# Altium PCB STK200_BLUETOOTH.PCBDOC
Units mm, origin at the board's own origin, x right, y up, seen from the top; angles counter-clockwise.
Board outline 152.4 x 101.6 mm, 2 copper layers (Top Layer, Bottom Layer); 40 components, 40 nets, 164 pads, 13 vias.
Unrouted connection lines stored in the file: 2.
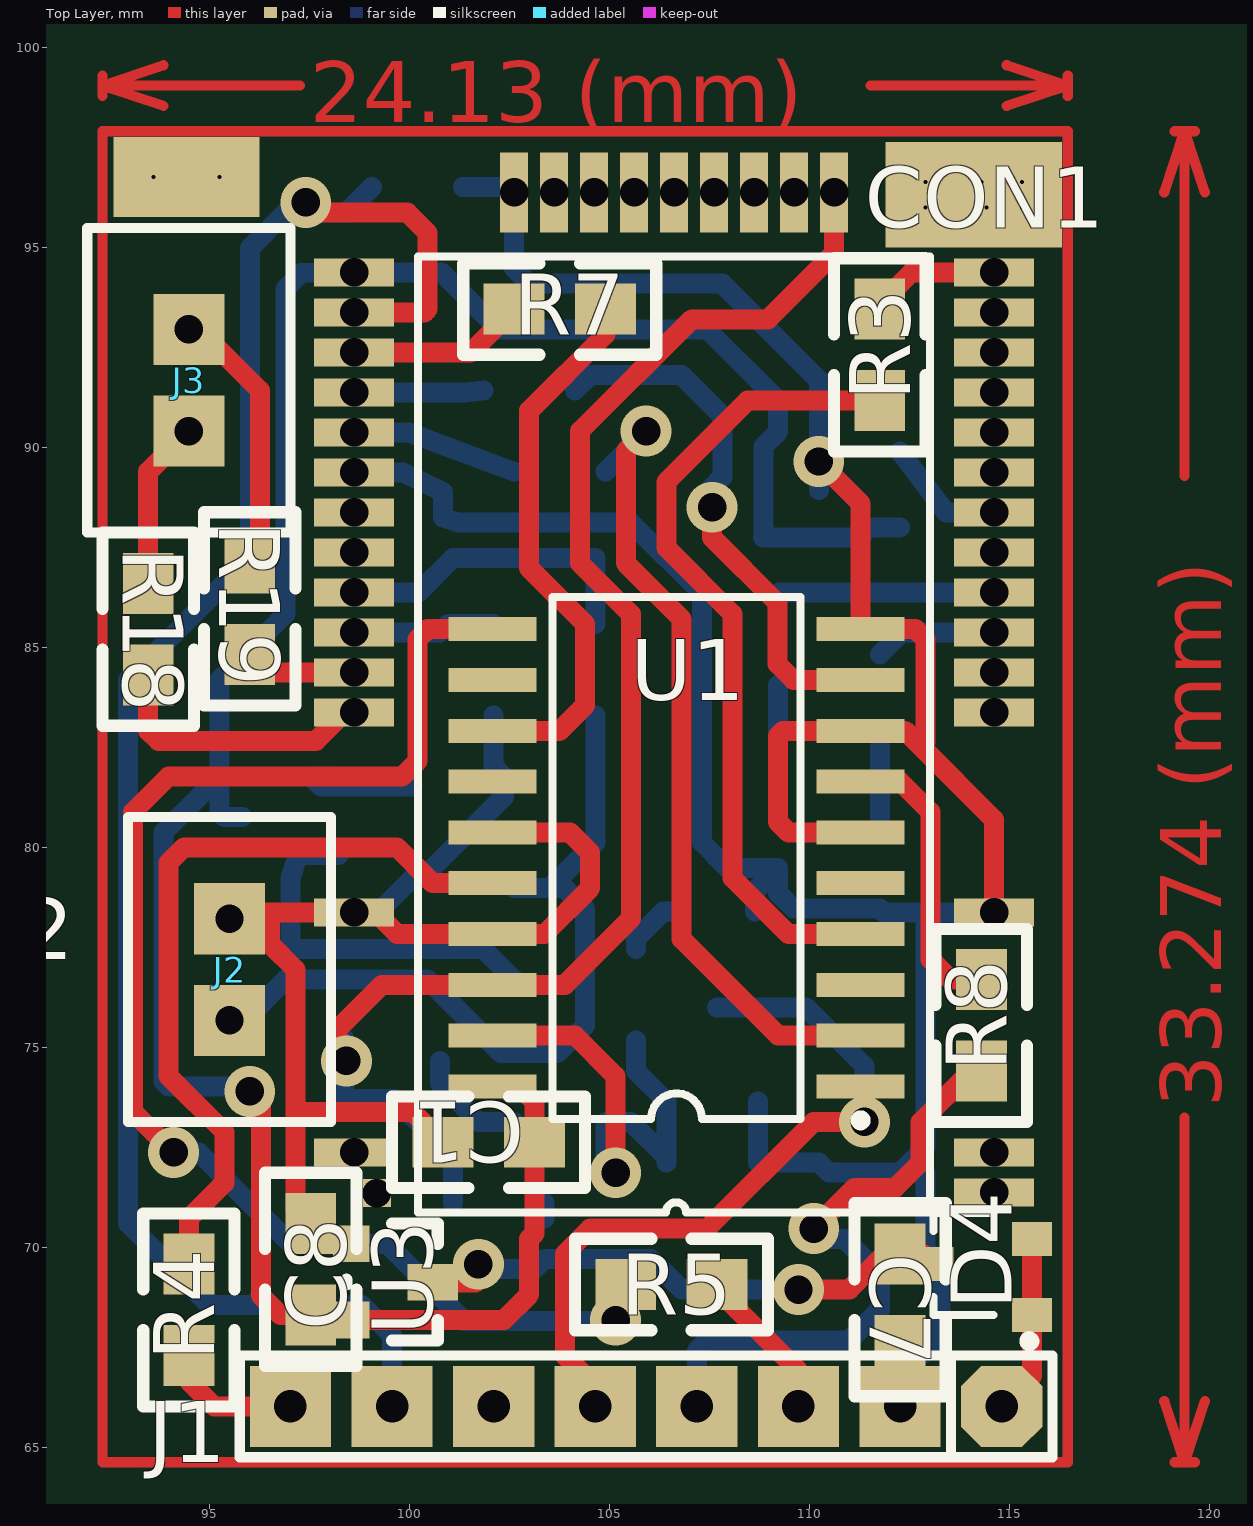
[diagram p0: Top Layer view]
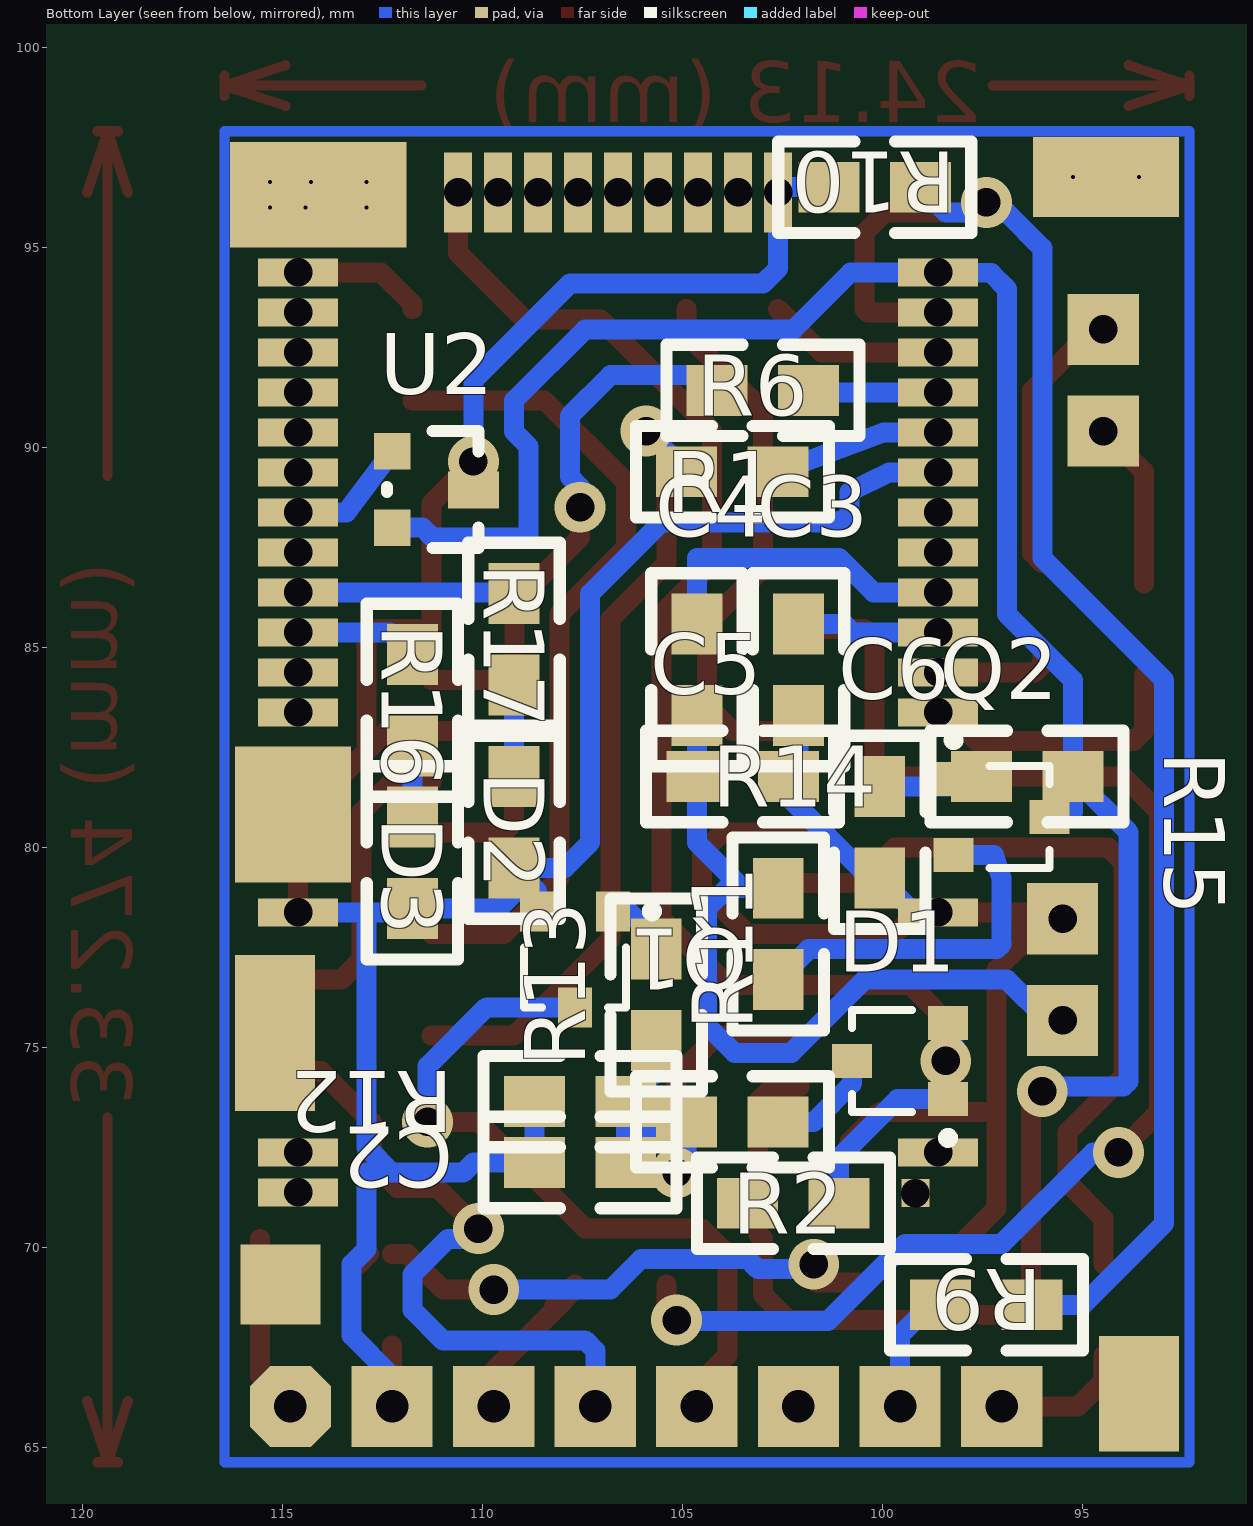
[diagram p1: Bottom Layer view, seen from below]

## Layer stack, top to bottom
Top Layer: signal copper 0.0356
Dielectric: dielectric 0.32, FR-4, Dk 4.8
Bottom Layer: signal copper 0.0356

## Board outline
25.4,25.4 177.8,25.4 177.8,127 25.4,127

## Design rules (kind name [scope] priority, off if disabled: settings)
Clearance [All] p1: gap=0.01
ComponentClearance [All] p1 off: gap=0.01 collisioncheckmode=0
PolygonConnect [All] p1: connectstyle=Relief reliefconductorwidth=0.254 reliefentries=4 polygonreliefangle="90 Angle"
RoutingLayers [All] p1: top layer=Horizontal bottom layer=Vertical
RoutingVias [All] p1: holewidth=0.711 width=1.27 viastyle="Through Hole" minholewidth=0.711 minwidth=1.27 maxholewidth=0.711 maxwidth=1.27
SolderMaskExpansion [All] p1: expansion=0.102
TestPointUsage [All] p1: valid=0 allowmultiple=FALSE
Testpoint [All] p1: side=15 testpointundercomponent=TRUE minsize=1.016 maxsize=2.54 preferedsize=1.524 minholesize=0 maxholesize=1.016 preferedholesize=0.813 testpointgrid=0.025 style=1023 order=-539222988
Width [All] p1: maxlimit=0.5 minlimit=0.5 preferedwidth=0.5
16 further rules are at their usual default settings.

## Components (designator, comment, footprint, x,y, rotation, side; value= is the part's Value field where it differs from the comment)
C1 "Cap" 0805 103.124,72.644 r180 top
C2 "Cap" 0805 108.712,72.136 r180 bottom
C3 "Cap" 0805 102.108,83.312 r90 bottom
C4 "Cap" 0805 104.648,83.312 r90 bottom
C5 "Cap" 0805 104.648,81.788 r180 bottom
C6 "Cap" 0805 100.076,79.248 r90 bottom
C7 "Cap" 0805 112.268,67.564 r90 top
C8 "Cap" 0805 97.536,70.612 r270 top
CON1 "F2M03AC2" F2M03AC2_conn 110.617,72.39 r180 top
D1 "BAT54C" SOT23#1 99.568,74.676 r90 bottom
D2 "TLED" 0805 109.22,81.788 r270 bottom
D3 "TLED" 0805 111.76,80.772 r270 bottom
D4 "BAT54C" SOT23#2 114.3,69.596 r90 top
J1 "TCON8" TSIP8 114.808,66.04 r180 top
J2 "MICRO" CON2 95.504,80.772 r90 top
J3 "SPKR" CON2 94.488,87.884 r270 top
Q1 "BSS123" SOT23#1 107.696,77.216 r0 bottom
Q2 "BSS123" SOT23#1 97.028,80.772 r270 bottom
R1 "Res2" 0805 102.616,89.408 r0 bottom
R2 "Res2" 0805 101.092,71.12 r0 bottom
R3 "Res2" 0805 111.76,93.472 r270 top
R4 "Res2" 0805 94.488,69.596 r270 top
R5 "Res2" 0805 107.696,69.088 r180 top
R6 "Res2" 0805 104.14,91.44 r180 bottom
R7 "Res2" 0805 102.616,93.472 r0 top
R8 "Res2" 0805 114.3,76.708 r270 top
R9 "Res2" 0805 98.552,68.58 r180 bottom
R10 "Res2" 0805 99.06,96.52 r0 bottom
R11 "Res2" 0805 102.616,73.152 r0 bottom
R12 "Res2" 0805 108.712,73.66 r180 bottom
R13 "Res2" 0805 105.664,75.184 r90 bottom
R14 "Res2" 0805 102.616,76.708 r90 bottom
R15 "Res2" 0805 97.536,81.788 r180 bottom
R16 "Res2" 0805 111.76,84.836 r270 bottom
R17 "Res2" 0805 109.22,86.36 r270 bottom
R18 "Res2" 0805 93.472,84.328 r90 top
R19 "Res2" 0805 96.012,84.836 r90 top
U1 "74ACT244M" SO20 106.68,79.756 r90 top
U2 "DS1818-10" SOT-23 112.268,89.916 r270 bottom
U3 "XC6206" sot-23 98.552,70.104 r270 top

## Footprints (in the part's own frame and the unit in brackets; to place one, negate y for a bottom-side part, rotate by r counter-clockwise, add the part's x,y. Pads: shape width x height; smd on the part's side, far side on the other; paste and mask are expansions set on the pad)
0805 [mil]
  rect 60x50 smd: 1(0,0) 2(90,0)
  silkscreen extent -50,-45 140,45
CON2 [mil]
  rect 70x70 hole 28: 1(-200,0) 2(-100,0)
  silkscreen extent -300,-100 0,100
F2M03AC2_conn [mm]
  rect 2x0.7 hole 0.711: 1(12,-11) 2(12,-12) 3(12,-13) 4(12,-14) 5(12,-15) 6(12,-16) 7(12,-17) 8(12,-18) 9(12,-19) 10(12,-20) 11(12,-21) 12(12,-22) 22(-4,-22) 23(-4,-21) 24(-4,-20) 25(-4,-19) 26(-4,-18) 27(-4,-17) 28(-4,-16) 29(-4,-15) 30(-4,-14) 31(-4,-13) 32(-4,-12) 33(-4,-11) 34(-4,-6) 35(12,-6) 36(-4,0) 37(-4,1) 38(12,0)
  rect 0.7x2 hole 0.711: 13(8,-24) 14(7,-24) 15(6,-24) 16(5,-24) 17(4,-24) 18(3,-24) 19(2,-24) 20(1,-24) 21(0,-24)
  rect 0.7x0.7 hole 0.711: 39(11.43,1.016)
  silkscreen extent -2.4,-22.4 10.4,1.5
SO20 [mm] "Small Outline, Plastic; 20 Leads; Body Width 7.5 mm; Pitch 1.27 mm"
  rect 0.6x2.2 smd: 1(-5.715,-4.6) 2(-4.445,-4.6) 3(-3.175,-4.6) 4(-1.905,-4.6) 5(-0.635,-4.6) 6(0.635,-4.6) 7(1.905,-4.6) 8(3.175,-4.6) 9(4.445,-4.6) 10(5.715,-4.6) 11(5.715,4.6) 12(4.445,4.6) 13(3.175,4.6) 14(1.905,4.6) 15(0.635,4.6) 16(-0.635,4.6) 17(-1.905,4.6) 18(-3.175,4.6) 19(-4.445,4.6) 20(-5.715,4.6)
  silkscreen extent -6.69,-4.73 6.53,3.1
SOT23#1 [mm] "SOT-23; 3 Leads; Body 3.0 x 2.5 mm, inc. leads (LxW max)"
  rect 0.85x1 smd: 1(-0.95,-1.2) 2(0.95,-1.2) 3(0,1.2)
  silkscreen extent -2.05,-1.32 1.27,1.2
SOT23#2 [mm] "SOT-23; 3 Leads; Body 3.0 x 2.5 mm, inc. leads (LxW max)"
  rect 0.85x1 smd: 1(-1.27,-1.27) 2(0.635,-1.27) 3(0,1.2)
  silkscreen extent -2.05,-1.32 1.28,1.2
SOT-23 [mil]
  rect 36x36 smd: 1(0,0) 2(75,0)
  rect 36x50 smd: 3(38,80)
  silkscreen extent -20,-5 95,85
sot-23 [mil]
  rect 36x36 smd: 1(0,0) 2(75,0)
  rect 36x50 smd: 3(38,80)
  silkscreen extent -20,-5 95,85
TSIP8 [mil]
  oct 80x80 hole 32: 1(0,0)
  rect 80x80 hole 32: 2(100,0) 3(200,0) 4(300,0) 5(400,0) 6(500,0) 7(600,0) 8(700,0)
  silkscreen extent -50,-50 750,50

## Part data
C1 C2 C3 C4 C5 C6 C7 C8: "Capacitor"
D1 D4: "Schottky Barrier Double Diode"
J2 J3: library part CON2
Q1 Q2: "N-channel Enhancement Mode Vertical D-MOSFET"
R1 R2 R3 R4 R5 R6 R7 R8 R9 R10 R11 R12 R13 R14 R15 R16 R17 R18 R19: "Resistor"
U1: "Octal Bus Buffer with 3 State Outputs (Non Inverted)"
U2: "3.3V EconoReset with Pushbutton"
U3: library part LM317

## Free pads (board coordinates)
  rect 2x2 smd far side: 0(93.599,65.913) 0(93.599,66.802) 0(114.3,80.137) 0(114.3,81.534) 0(115.062,69.088) 0(115.189,74.422) 0(115.189,76.327) 0(115.189,80.137) 0(115.189,81.534)
  rect 2x2 hole 0.1: 0(93.599,96.774) 0(95.25,96.774) 0(112.903,96.012) 0(112.903,96.647) 0(114.3,96.647) 0(114.427,96.012) 0(115.316,96.012) 0(115.316,96.647)

## Via types
v1: diameter 1.27, hole 0.711, Top Layer to Bottom Layer, 13 vias

## Nets (pads, with @x,y where several pads share a name; then routed paths per layer and width w, separated by ;. In a path a pad name is that pad's centre, name@x,y a point inside that pad or via, vN(x,y) a via of type N, cw(c..) or ccw(c..) an arc to the next point about the centre after c; other vN are vias at no path point)
3V3: C1.1 C8.2 CON1.12 Q2.3 R15.2 U1.20 U2.2 U3.2 | length 80.9
  Top Layer w0.5: v1@95.758,74.093 v1@96.292,73.559 ; v1@95.974,73.876 v1@96.292,73.559 ; U3.2 102.362,68.199 102.995,68.832 102.995,70.229 103.124,70.358 ; v1@96.292,73.559 96.292,68.808 96.774,68.326 ; 96.774,68.326 C8.2 97.434,68.326 96.774,68.326 ; U1.20@102.743,74.041 U1.20 U1.20@102.743,74.041 ; U1.20@102.743,74.041 103.124,73.66 ; 103.124,70.358 103.124,73.66 ; 103.124,70.358 C1.1 103.124,73.66
  Bottom Layer w0.5: 97.282,94.361 96.901,93.98 96.901,85.852 95.25,84.201 ; 93.853,80.391 R15.2 ; 93.853,80.391 R15.2 ; 93.853,80.391 93.853,74.168 93.98,74.041 ; 93.98,74.041 v1@96.012,74.041 ; 93.98,74.041 v1@96.012,74.041 ; 95.25,80.899 95.25,84.201 ; 95.25,80.899 R15.2 ; 95.25,80.899 Q2.3@95.377,80.772 ; R15.2 95.25,84.201 ; Q2.3@95.377,80.772 Q2.3 Q2.3@95.377,80.772 ; v1@96.012,74.041 96.094,73.959 96.075,73.977 v1@96.012,74.041 ; CON1.12 97.282,94.37 CON1.12 ; CON1.12 100.809,94.39 ; CON1.12 100.809,94.39 ; 100.809,94.39 102.235,92.964 107.442,92.964 109.22,91.186 109.22,90.407 108.856,90.043 108.856,87.761 108.839,87.757 111.252,87.757 111.506,88.011 ; 111.506,88.011 U2.2 111.506,88.011
  other v1: 96.012,73.914
5V: D4.1 D4.2 J1.1 | length 9
  Top Layer w0.5: 115.57,66.802 J1.1 115.57,66.802 ; 115.57,66.802 D4.1 ; 115.57,66.802 D4.1 ; D4.1 D4.2 D4.1
/RST: J1.5 Q1.3 U1.1 | length 20
  Top Layer w0.5: J1.5 104.648,66.548 103.886,67.31 103.886,69.85 104.521,70.485 107.442,70.485 110.109,73.152 v1(111.379,73.152) 111.379,73.942 U1.1
  Bottom Layer w0.5: Q1.3 109.912,76.016 111.379,74.549 v1@111.379,72.771
CTS: CON1.11 R9.2 R10.1 | length 43.3
  Top Layer w0.5: CON1.11 100.375,93.39 100.457,93.472 100.457,95.377 99.949,95.885 ; 99.949,95.885 97.409,95.885 99.949,95.885
  Bottom Layer w0.5: R9.2@96.266,68.834 R9.2 94.996,68.58 92.964,70.612 92.964,84.201 96.012,87.249 96.012,94.996 96.901,95.885 98.425,95.885 R10.1
  other v1: 97.409,96.139
DSR: CON1.21 D1.1 D1.2 R2.1 U1.18 | length 49.2
  Top Layer w0.5: 98.171,75.438 v1(98.425,74.676) 98.171,75.438 ; 98.171,75.438 99.314,76.581 ; 99.314,76.581 103.886,76.581 ; 99.314,76.581 U1.18 103.886,76.581 ; 103.886,76.581 105.537,78.232 105.537,85.852 104.267,87.122 104.267,90.424 107.061,93.218 108.966,93.218 110.617,94.869 ; 110.617,94.869 CON1.21 110.617,94.869
  Bottom Layer w0.5: D1.2@98.171,75.429 D1.2@98.368,75.232 ; D1.2@98.171,75.429 v1(98.425,74.676) 98.368,74.845 D1.2@98.171,75.429 ; D1.2@98.171,75.429 D1.2@98.368,75.232 ; D1.1 D1.2@98.368,75.232 ; D1.1 99.629,73.726 ; D1.1 99.629,73.726 ; 99.629,73.726 101.092,72.263 ; 101.092,72.263 R2.1 101.092,72.263
DTR: CON1.22 R3.1 | length 5.5
  Top Layer w0.5: R3.1@111.76,93.599 R3.1 R3.1@111.76,93.599 ; R3.1@111.76,93.599 112.551,94.39 ; 112.551,94.39 CON1.22 112.551,94.39
GND: C1.2 C2.1 C3.1 C5.2 C6.1 C7.1 C8.1 CON1.7 CON1.13 CON1.34 CON1.35 D2.2 D3.2 J1.2 J2.2 Q1.2 R10.2 R12.1 U1.6 U1.8 U1.10 U1.15 U1.17 U2.3 U3.1 | length 186.6
  Top Layer w0.5: J2.2@95.662,78.39 J2.2 J2.2@95.662,78.39 ; J2.2@95.662,78.39 CON1.35@99.156,78.39 ; J2.2@95.662,78.39 96.52,78.39 ; 96.52,77.597 96.52,78.39 ; 96.52,77.597 96.52,78.232 96.52,78.39 ; 96.52,77.597 97.155,76.962 ; 96.52,78.39 CON1.35 CON1.35@99.156,78.39 ; C8.1@97.155,70.993 C8.1@98.044,70.104 ; C8.1@97.155,70.993 97.155,76.962 ; C8.1@97.155,70.993 97.155,73.406 ; C8.1@97.155,70.993 C8.1 C8.1@98.044,70.104 ; 97.155,73.406 100.076,73.406 ; 97.155,73.406 100.076,73.406 ; 97.155,73.406 97.155,76.962 ; C8.1@98.044,70.104 U3.1 C8.1@98.044,70.104 ; CON1.35@99.156,78.39 99.695,77.851 ; 99.695,77.851 103.378,77.851 ; 99.695,77.851 U1.17 103.378,77.851 ; 100.076,73.406 C1.2 100.076,73.406 ; 103.378,77.851 104.521,78.994 104.521,79.883 104.013,80.391 ; 104.013,80.391 U1.15 104.013,80.391 ; 109.347,82.931 112.395,82.931 ; 109.347,82.931 U1.8 112.395,82.931 ; 109.347,82.931 109.22,82.804 109.22,80.645 109.474,80.391 ; 109.474,80.391 U1.6 109.474,80.391 ; U1.10 112.649,85.471 ; U1.10 111.28,88.618 ; U1.10 112.649,85.471 ; U1.10 111.28,88.618 ; 111.28,88.618 v1(110.236,89.662) 111.28,88.618 ; 112.395,82.931 114.617,80.709 ; 112.395,82.931 112.794,82.532 ; 112.649,85.471 112.903,85.217 112.903,82.64 ; 112.794,82.532 112.903,82.64 ; 112.794,82.532 112.903,82.64 ; 112.794,82.532 114.617,80.709 ; 114.617,80.709 CON1.34 114.617,80.709 ; J1.2 C7.1 J1.2
  Bottom Layer w0.5: J1.2@112.268,66.802 113.284,67.818 113.284,69.596 112.903,69.977 112.903,71.882 ; CON1.35@99.218,78.39 CON1.35 CON1.35@99.218,78.39 ; CON1.35@99.218,78.39 C6.1 ; CON1.35@99.218,78.39 C6.1 ; 99.84,89.39 CON1.7 99.84,89.39 ; 99.84,89.39 100.838,88.9 100.838,88.265 101.219,88.138 105.537,88.138 107.315,86.36 107.315,80.137 107.95,79.502 D2.2 ; C6.1 C6.1@100.33,79.248 ; C6.1 C6.1@100.33,79.248 ; C6.1@100.33,79.248 102.362,81.28 C5.2 ; C5.2@102.108,82.042 C3.1 C5.2@102.108,82.042 ; C5.2@102.108,82.042 C5.2 ; C5.2@102.108,82.042 C5.2 ; CON1.13@102.487,96.52 R10.2 CON1.13@102.487,96.52 ; CON1.13@102.487,96.52 CON1.13 ; CON1.13@102.487,96.52 CON1.13 ; 102.617,94.489 CON1.13 ; 102.617,94.489 CON1.13 ; 102.617,94.489 102.999,94.107 107.823,94.107 110.236,91.694 ; D2.2@108.646,78.928 Q1.2 D2.2@108.646,78.928 ; D2.2@108.646,78.928 D2.2 ; D2.2@108.646,78.928 D2.2 ; C2.1 110.236,72.136 ; C2.1 R12.1 C2.1 ; C2.1 110.236,72.136 ; D2.2@109.22,78.867 D2.2 ; D2.2@109.22,78.867 D2.2 ; D2.2@109.22,78.867 109.601,78.486 ; 109.601,78.486 D3.2 ; 109.601,78.486 D3.2 ; 110.236,72.136 110.49,71.882 ; 110.236,91.694 U2.3 v1(110.236,89.662) 110.236,91.694 ; 110.49,71.882 112.903,71.882 ; 110.49,71.882 112.268,71.882 ; D3.2 D3.2@111.856,78.39 ; D3.2 D3.2@111.856,78.39 ; D3.2@111.856,78.39 CON1.34 112.903,78.39 ; D3.2@111.856,78.39 112.903,78.39 ; 112.268,71.882 112.903,72.517 ; 112.268,71.882 112.903,72.517 ; 112.268,71.882 112.903,71.882 ; 112.903,72.517 112.903,78.39 ; 112.903,72.517 112.903,78.39
MIC+: C4.2 CON1.4 | length 11.3
  Bottom Layer w0.5: 100.233,86.39 CON1.4 100.233,86.39 ; 100.233,86.39 101.092,87.249 104.648,87.249 ; 104.648,87.249 C4.2 104.648,87.249
MIC-: C3.2 CON1.3 | length 6.9
  Bottom Layer w0.5: 100.757,85.39 CON1.3 100.757,85.39 ; 100.757,85.39 100.965,85.598 ; 100.965,85.598 C3.2 100.965,85.598
MISO: J1.7 R9.1 | length 5.1
  Bottom Layer w0.5: R9.1@98.806,68.58 R9.1 R9.1@98.806,68.58 ; R9.1@98.806,68.58 99.568,67.818 ; 99.568,67.818 J1.7 99.568,67.818
MOSI: J1.8 R4.2 | length 6
  Top Layer w0.5: R4.2@94.488,66.675 R4.2 R4.2@94.488,66.675 ; R4.2@94.488,66.675 95.123,66.04 ; 95.123,66.04 J1.8 95.123,66.04
NetC4_1: C4.1 C5.1 J2.1 R14.2 | length 26.8
  Bottom Layer w0.5: J2.1 95.504,75.565 J2.1 ; J2.1 J2.1@95.885,75.692 ; J2.1 J2.1@95.885,75.692 ; J2.1@95.885,75.692 96.901,76.708 100.457,76.708 102.287,74.878 103.707,74.878 104.394,75.565 104.394,78.486 103.886,78.994 ; 103.505,78.994 104.648,80.137 ; 103.505,78.994 104.648,80.137 ; 103.505,78.994 103.886,78.994 ; 103.505,78.994 R14.2 103.886,78.994 ; 104.648,80.137 C4.1 C5.1 104.648,80.137
NetC6_2: C6.2 Q2.1 R15.1 | length 6.7
  Bottom Layer w0.5: R15.1 Q2.1@97.79,81.534 ; R15.1 Q2.1@98.162,81.788 ; R15.1 Q2.1@98.162,81.788 ; R15.1 Q2.1@97.79,81.534 ; Q2.1@97.79,81.534 C6.2 98.228,81.534 Q2.1@97.79,81.534 ; Q2.1@98.162,81.788 Q2.1 Q2.1@98.162,81.788
NetC7_2: C7.2 D4.3 U3.3 | length 15.2
  Top Layer w0.5: v1(109.728,68.961) 110.998,68.961 111.887,69.85 C7.2 ; v1@101.651,69.139 U3.3 101.27,69.139 v1@101.651,69.139 ; v1@101.651,69.139 101.981,69.469 101.917,69.406 v1@101.651,69.139 ; D4.3@112.846,69.85 D4.3 D4.3@112.846,69.85
  Bottom Layer w0.5: v1(101.727,69.596) 101.854,69.469 103.124,69.469 103.378,69.723 106.045,69.723 106.807,68.961 v1(109.728,68.961)
NetCON1_28: CON1.28 U2.1 | length 6.2
  Bottom Layer w0.5: 113.413,88.39 U2.1 113.413,88.39 ; 113.413,88.39 CON1.28 113.413,88.39
NetCON1_30: CON1.30 R17.1 | length 10.7
  Bottom Layer w0.5: R17.1@109.25,86.39 CON1.30 R17.1@109.25,86.39
NetCON1_31: CON1.31 R16.1 | length 6.2
  Bottom Layer w0.5: R16.1@112.314,85.39 R16.1 R16.1@112.314,85.39 ; R16.1@112.314,85.39 CON1.31 R16.1@112.314,85.39
NetD1_3: D1.3 R11.1 | length 4.3
  Bottom Layer w0.5: 100.768,74.111 D1.3 100.768,74.111 ; 100.768,74.111 101.727,73.152 ; 101.727,73.152 R11.1 101.727,73.152
NetD2_1: D2.1 R17.2 | length 4.6
  Bottom Layer w0.5: D2.1 R17.2 D2.1
NetD3_1: D3.1 R16.2 | length 3.6
  Bottom Layer w0.5: D3.1 R16.2 D3.1
NetJ3_1: J3.1 R19.2 | length 7.4
  Top Layer w0.5: J3.1@94.742,92.964 J3.1 J3.1@94.742,92.964 ; J3.1@94.742,92.964 96.266,91.44 R19.2@96.266,87.376 ; R19.2@96.266,87.376 R19.2 R19.2@96.266,87.376
NetJ3_2: J3.2 R18.2 | length 8.5
  Top Layer w0.5: 93.472,89.408 R18.2 93.472,89.408 ; 93.472,89.408 J3.2 93.472,89.408
NetQ1_1: Q1.1 R13.2 | length 2.3
  Bottom Layer w0.5: R13.2@105.664,77.724 R13.2 R13.2@105.664,77.724 ; R13.2@105.664,77.724 Q1.1@106.356,78.416 ; Q1.1@106.356,78.416 Q1.1 Q1.1@106.356,78.416
NetQ2_2: Q2.2 R14.1 | length 11.3
  Bottom Layer w0.5: 97.221,79.822 Q2.2 97.221,79.822 ; 97.221,79.822 97.028,79.248 97.028,77.597 97.155,77.47 101.854,77.47 ; 101.854,77.47 R14.1 101.854,77.47
NetR1_2: R1.2 U1.2 | length 24.6
  Top Layer w0.5: 105.41,89.916 v1(105.918,90.424) 105.41,89.916 ; 105.41,89.916 105.41,87.122 106.807,85.725 106.807,77.724 109.22,75.311 ; 109.22,75.311 U1.2 109.22,75.311
  Bottom Layer w0.5: R1.2 v1(105.918,90.424) R1.2
NetR3_2: R3.2 U1.4 | length 20.5
  Top Layer w0.5: U1.4 109.474,77.851 108.077,79.248 108.077,85.852 106.426,87.503 106.426,89.154 108.458,91.186 R3.2
NetR4_1: R4.1 U1.16 | length 22.2
  Top Layer w0.5: 94.488,70.739 R4.1 94.488,70.739 ; 94.488,70.739 95.377,71.628 95.377,72.898 93.98,74.295 93.98,79.629 94.361,80.01 99.695,80.01 100.584,79.121 ; 100.584,79.121 U1.16 100.584,79.121
NetR5_2: R5.2 U1.11 | length 40.1
  Top Layer w0.5: 93.091,73.406 v1(94.107,72.39) 93.091,73.406 ; 93.091,73.406 93.091,80.899 93.98,81.788 99.822,81.788 100.203,82.169 100.203,85.217 100.457,85.471 ; 100.457,85.471 U1.11 100.457,85.471 ; R5.2@105.41,68.453 v1(105.156,68.199) R5.2@105.41,68.453 ; R5.2@105.41,68.453 R5.2 R5.2@105.41,68.453
  Bottom Layer w0.5: 94.742,72.39 v1(94.107,72.39) 94.742,72.39 ; 94.742,72.39 97.028,70.104 99.441,70.104 101.367,68.178 v1@105.135,68.178 ; v1@105.135,68.178 v1(105.156,68.199) v1@105.135,68.178
NetR6_1: R6.1 U1.9 | length 17
  Top Layer w0.5: 107.569,87.757 v1(107.569,88.519) 107.569,87.757 ; 107.569,87.757 109.201,86.125 109.201,84.601 109.601,84.201 ; 109.601,84.201 U1.9 109.601,84.201
  Bottom Layer w0.5: R6.1@104.521,91.821 R6.1 R6.1@104.521,91.821 ; R6.1@104.521,91.821 106.807,91.821 107.823,90.805 107.823,89.281 v1@107.569,89.027 ; v1@107.569,89.027 v1(107.569,88.519) v1@107.569,89.027
NetR7_2: R7.2 U1.13 | length 16.2
  Top Layer w0.5: 103.759,82.931 U1.13 103.759,82.931 ; 103.759,82.931 104.394,83.566 104.394,85.598 102.997,86.995 102.997,90.932 R7.2@104.902,92.837 ; R7.2@104.902,92.837 R7.2 R7.2@104.902,92.837
NetR8_1: R8.1 U1.7 | length 9
  Top Layer w0.5: U1.7@112.268,81.661 U1.7 U1.7@112.268,81.661 ; U1.7@112.268,81.661 113.03,80.899 113.03,77.216 113.538,76.708 ; 113.538,76.708 R8.1 113.538,76.708
RST: C2.2 R11.2 R12.2 R13.1 U1.19 | length 23.8
  Top Layer w0.5: 104.14,75.311 U1.19 104.14,75.311 ; 104.14,75.311 105.156,74.295 ; 105.156,74.295 v1(105.156,71.882) 105.156,74.295
  Bottom Layer w0.5: v1@104.902,72.136 v1(105.156,71.882) v1@104.902,72.136 ; v1@104.902,72.136 R11.2 ; v1@104.902,72.136 R11.2 ; R11.2 R11.2@105.537,73.152 ; R11.2 R11.2@105.537,73.152 ; R11.2@105.537,73.152 C2.2@106.426,72.263 ; R11.2@105.537,73.152 105.727,72.962 C2.2@106.426,72.263 ; R13.1@105.664,74.422 R13.1 R13.1@105.664,74.422 ; R13.1@105.664,74.422 R12.2 ; R13.1@105.664,74.422 R12.2 ; C2.2 C2.2@106.426,72.263 ; C2.2 R12.2 ; C2.2 C2.2@106.426,72.263 ; C2.2@106.426,72.263 R12.2
RTS: CON1.8 R1.1 | length 8.4
  Bottom Layer w0.5: 99.983,90.39 CON1.8 99.983,90.39 ; 99.983,90.39 R1.1 99.983,90.39
RXBLUE: CON1.9 R6.2 | length 6.5
  Bottom Layer w0.5: R6.2@101.396,91.39 CON1.9 R6.2@101.396,91.39 ; R6.2@101.396,91.39 R6.2 R6.2@101.396,91.39
RXUC: J1.4 R8.2 | length 19.3
  Top Layer w0.5: 111.125,71.501 v1(110.109,70.485) 111.125,71.501 ; 111.125,71.501 112.141,71.501 112.776,72.136 112.776,73.152 R8.2@114.046,74.422 ; R8.2@114.046,74.422 R8.2 R8.2@114.046,74.422
  Bottom Layer w0.5: 107.188,67.437 J1.4 107.188,67.437 ; 107.188,67.437 107.442,67.691 110.998,67.691 111.76,68.453 111.76,69.342 110.871,70.231 v1@110.363,70.231 ; v1@110.363,70.231 v1(110.109,70.485) v1@110.363,70.231
SCK: J1.6 R2.2 | length 0.8
  Bottom Layer w0.5: R2.2@103.378,70.739 R2.2 R2.2@103.378,70.739
SPKR+: CON1.2 R19.1 | length 5.6
  Top Layer w0.5: R19.1@96.012,84.582 R19.1 R19.1@96.012,84.582 ; R19.1@96.012,84.582 R19.1@96.204,84.39 ; R19.1@96.204,84.39 CON1.2 R19.1@96.204,84.39
SPKR-: CON1.1 R18.1 | length 8.6
  Top Layer w0.5: 93.472,82.931 R18.1 93.472,82.931 ; 93.472,82.931 93.726,82.677 97.663,82.677 CON1.1@98.376,83.39 ; CON1.1@98.376,83.39 CON1.1 CON1.1@98.376,83.39
TXBLUE: CON1.10 R7.1 | length 8.9
  Top Layer w0.5: 101.534,92.39 CON1.10 101.534,92.39 ; 101.534,92.39 R7.1 101.534,92.39
TXUC: J1.3 R5.1 | length 8
  Top Layer w0.5: R5.1@107.696,68.961 J1.3@109.728,66.929 ; R5.1@107.696,68.961 R5.1 R5.1@107.696,68.961 ; R5.1@107.696,68.961 R5.1@108.204,68.453 ; R5.1@108.204,68.453 108.204,68.58 R5.1@108.204,68.453 ; R5.1@108.204,68.453 J1.3@109.728,66.929 ; J1.3@109.728,66.929 J1.3 J1.3@109.728,66.929
pads on no net: CON1.5 CON1.6 CON1.14 CON1.15 CON1.16 CON1.17 CON1.18 CON1.19 CON1.20 CON1.23 CON1.24 CON1.25 CON1.26 CON1.27 CON1.29 CON1.32 CON1.33 CON1.36 CON1.37 CON1.38 CON1.39 U1.3 U1.5 U1.12 U1.14
copper on no net: | length 42
  Top Layer w0.254: 92.329,98.806 92.329,99.314 ; 93.853,98.552 92.329,99.06 ; 93.853,99.568 92.329,99.06 ; 97.259,99.06 92.329,99.06 ; 111.529,99.06 116.459,99.06 ; 114.935,98.552 116.459,99.06 ; 114.935,99.568 116.459,99.06 ; 116.459,98.806 116.459,99.314 ; 118.872,66.167 119.38,64.643 ; 118.872,96.393 119.38,97.917 ; 119.126,64.643 119.634,64.643 ; 119.126,97.917 119.634,97.917 ; 119.38,73.256 119.38,64.643 ; 119.38,89.304 119.38,97.917 ; 119.888,66.167 119.38,64.643 ; 119.888,96.393 119.38,97.917

## Other copper
Top Layer:
  text "24.13 (mm)" at 97.513,98.146 h1.52
  text "33.274 (mm)" at 120.294,73.51 h1.52 r90
Multi-Layer:
  lines w0.254: 92.329,64.643 116.205,64.643 116.459,64.643 116.459,97.917 116.078,97.917 92.329,97.917 92.329,64.643